# EAGLE board final - shield (EAGLE 9.4.2)
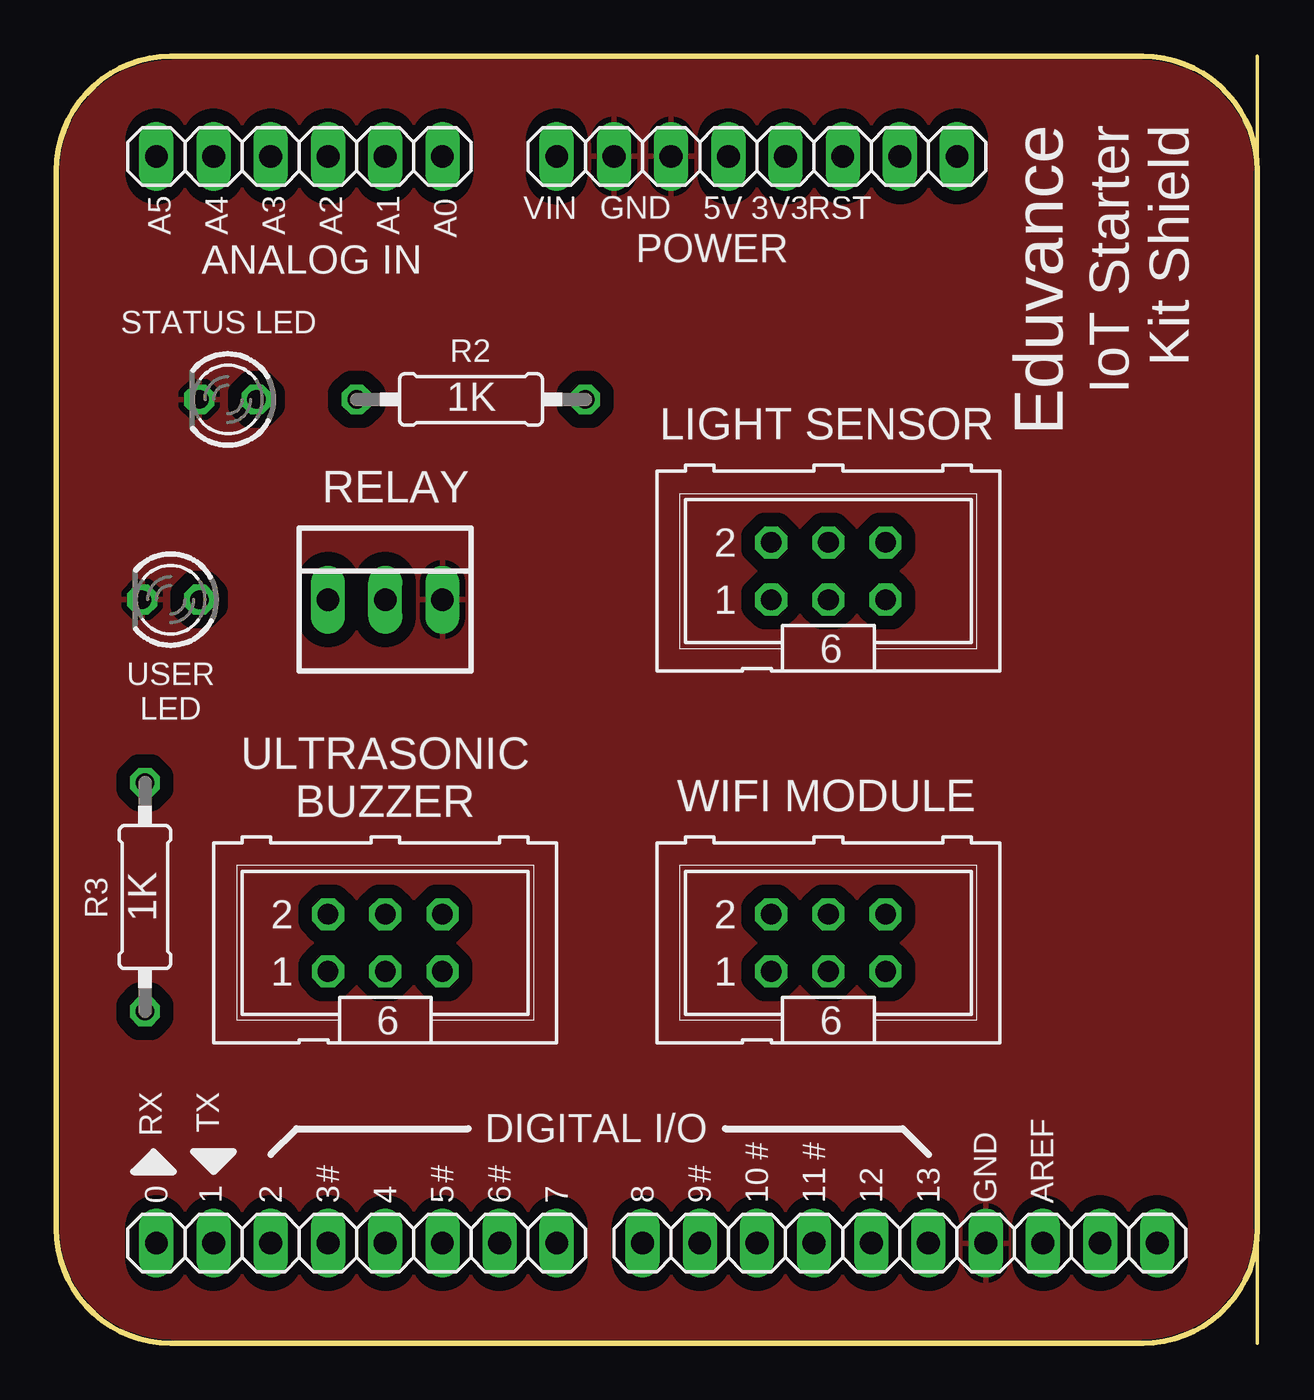
[diagram p0: board, top side]
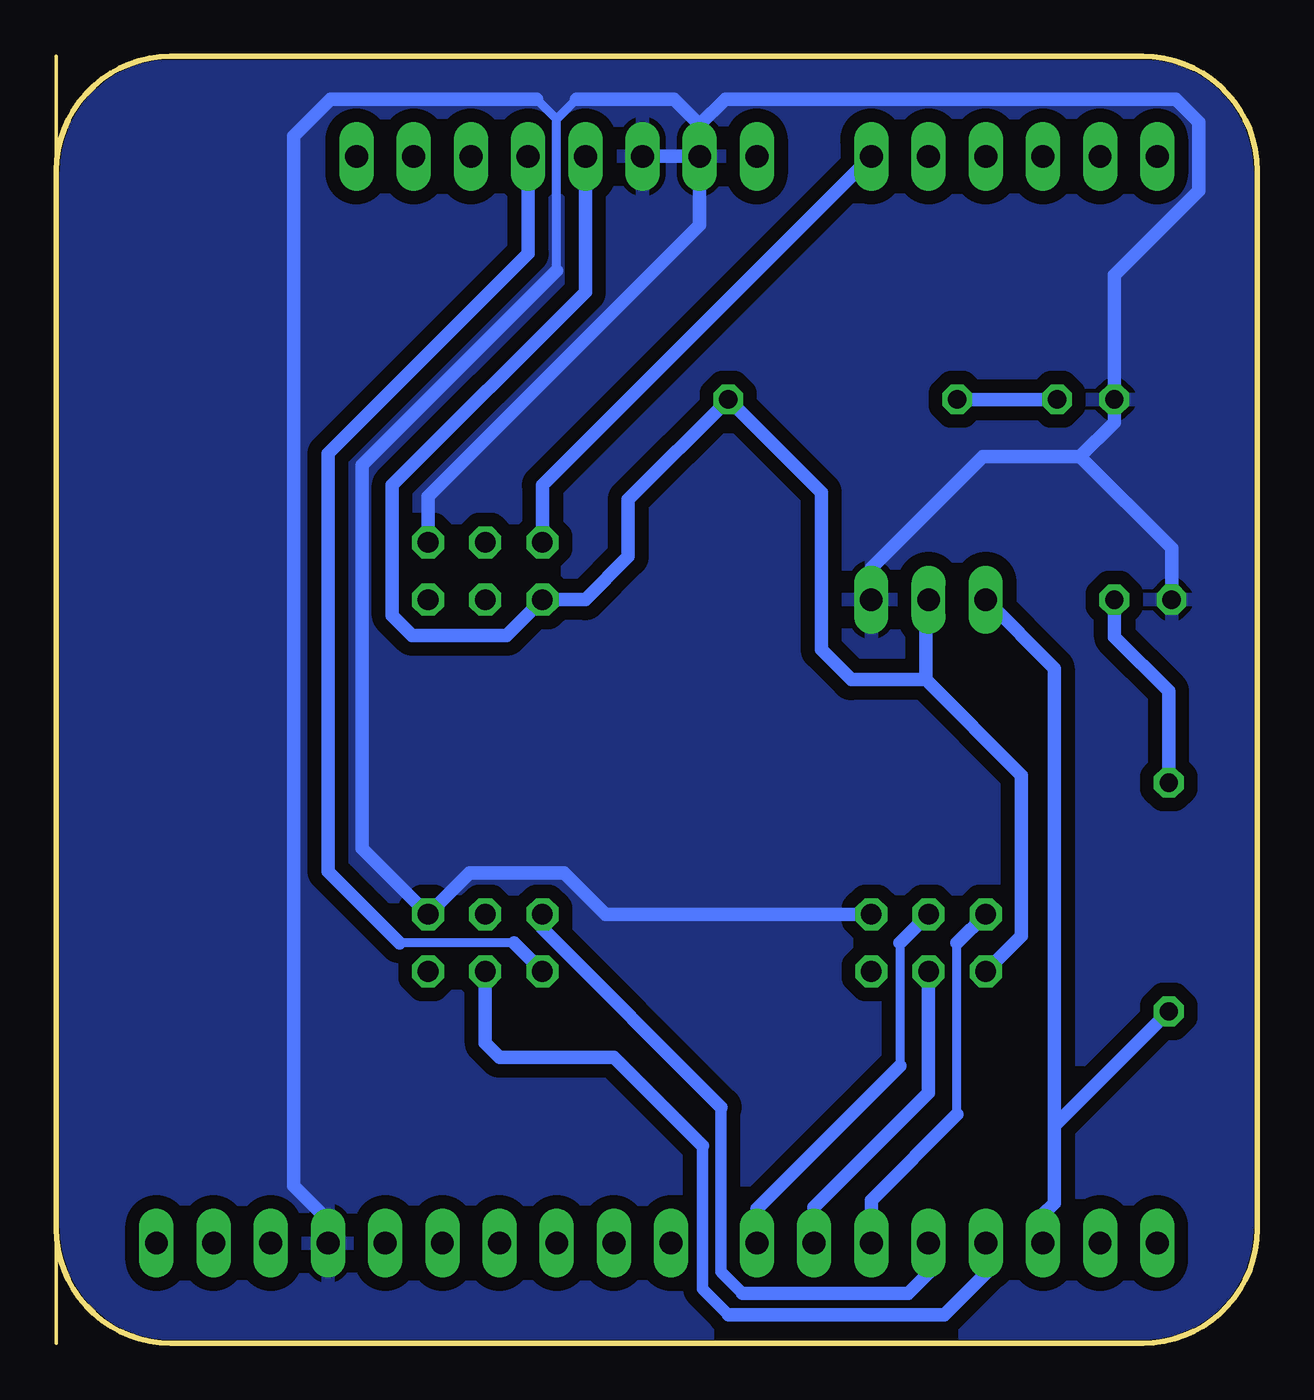
[diagram p1: board, bottom side, seen from below]

Size 53.34 x 57.15 mm. Coordinates in mm from the lower left corner, seen from the top.
Outline: 53.34,0 53.34,57.15
Outline: 5.08,0 48.26,0 arc90 53.34,5.08 53.34,52.07 arc90 48.26,57.15 5.08,57.15 arc90 0,52.07 0,5.08 arc90 5.08,0
Copper layers (1*16): Top 0.035mm / dielectric 1.5mm / Bottom 0.035mm
Design rules "default *": minimum track width 20mil, minimum drill 0.35mm, track to track 24mil, track to pad 24mil, pad to pad 24mil, via to via 24mil, smd to smd 24mil, copper to edge 1mil, drill to drill 6mil, minimum pad ring 10mil, minimum via ring 8mil, stop-mask expansion 4mil, vias tented up to drill 0mil, thermal gap 10mil

## Footprints (pad centres in the part's own frame; a part is rotated, then mirrored left to right if it is on the bottom)
1X02 = drill 1.016 long: 1 -1.27,0; 2 1.27,0
1X06 = drill 1.016 long: 1 -6.35,0; 2 -3.81,0; 3 -1.27,0; 4 1.27,0; 5 3.81,0; 6 6.35,0
1X08 = drill 1.016 long: 1 -8.89,0; 2 -6.35,0; 3 -3.81,0; 4 -1.27,0; 5 1.27,0; 6 3.81,0; 7 6.35,0; 8 8.89,0
LED3MM = drill 0.813 octagon: A -1.27,0; K 1.27,0
ML6 = drill 0.914 octagon: 1 -2.54,-1.27; 2 -2.54,1.27; 3 0,-1.27; 4 0,1.27; 5 2.54,-1.27; 6 2.54,1.27
0207/10 = drill 0.813 octagon: 1 -5.08,0; 2 5.08,0
22-23-2031 = drill 1 long: 1 -2.54,0; 2 0,0; 3 2.54,0

## Placement (x,y rotation side)
_  [1X02]  47.63,4.45 0 top
__  [1X02]  38.74,52.7 0 top
AD  [1X06]  10.8,52.7 180 top
IOH  [1X08]  34.93,4.45 0 top
IOL  [1X08]  13.34,4.45 0 top
LED  USER LED  [LED3MM]  5.08,33.02 180 top
LIGHT_SENSOR2  LIGHT SENSOR  [ML6]  34.29,34.29 0 top
POWER  [1X06]  28.58,52.7 180 top
R2  1K  [0207/10]  18.41,41.91 180 top
R3  1K  [0207/10]  3.94,19.81 270 top
RELAY  22-23-2031  [22-23-2031]  14.61,33.02 0 top
STATUS_LED  STATUS LED  [LED3MM]  7.62,41.91 180 top
ULTRASONIC_BUZZER2  ULTRASONIC BUZZER  [ML6]  14.61,17.78 0 top
WIFI_MODULE2  WIFI MODULE  [ML6]  34.29,17.78 0 top

## Library data of the parts
_ __ AD IOH IOL POWER = pinhead
LED STATUS_LED = led
LIGHT_SENSOR2 ULTRASONIC_BUZZER2 WIFI_MODULE2 = con-harting-ml; OC_FARNELL: unknown; OC_NEWARK: unknown
R2 R3 = rcl; SPICEPREFIX: R
RELAY = con-molex; MF: MOLEX; MPN: 22-23-2031; OC_FARNELL: 1462950; OC_NEWARK: 30C0862

## Nets
GND2: IOH.7 LED.K POWER.4 POWER.5 RELAY.3 STATUS_LED.K
N$1: POWER.3 RELAY.2
N$3: AD.1
N$4: IOL.6
N$5: IOL.7
N$6: IOL.8
N$7: POWER.2
N$8: IOL.4
N$9: IOL.5
N$10: STATUS_LED.A
N$11: IOL.3 R3.2 RELAY.1
S$1: LED.A R3.1

## Tracks (layer width: path | path; a pad name or v marks a point on that pad's centre or on a via)
GND2
  Bottom 0.406: 31.12,54.36 32,55.24 | 31.12,47.62 31.12,54.36 | 30.23,55.24 31.12,54.36
  Bottom 0.61: 17.15,19.05 28.96,19.05 30.8,20.89 34.99,20.89 36.83,19.05 39.75,21.97 39.75,38.99 31.12,47.62 | 36.83,35.56 36.83,37.59 24.77,49.66 POWER.5 | POWER.5 24.77,53.02 | 32,55.24 41.15,55.24 42.8,53.59 42.8,6.99 41.27,5.46 IOH.7 | POWER.5 POWER.4 | 24.77,54.1 23.62,55.24 3.62,55.24 2.6,54.23 2.6,51.18 6.35,47.43 STATUS_LED.K 6.35,40.89 7.87,39.37 | POWER.5 24.77,54.1 | 24.77,54.1 25.91,55.24 30.23,55.24 | RELAY.3 17.15,34.42 12.19,39.37 7.87,39.37 | LED.K 3.81,35.31 7.87,39.37
  pour Bottom: 0,57.15 53.34,57.15 53.34,0 0,0
  pour Top: 0,57.15 0,0 53.34,0 53.34,57.15
N$1
  Bottom 0.61: POWER.3 29.85,46.67 38.42,38.1 38.42,32.32 37.53,31.43 33.34,31.43 31.75,33.02 29.85,33.02 27.94,34.92 27.94,37.47 23.49,41.91 19.37,37.78 19.37,30.8 18.03,29.46 14.73,29.46 | 12.07,16.51 10.48,18.1 10.48,25.21 14.73,29.46 | 14.73,29.46 14.73,32.89 RELAY.2
N$3
  Bottom 0.61: 31.75,35.56 31.75,38.1 AD.1
N$4
  Bottom 0.406: 13.34,10.16 13.34,17.78
  Bottom 0.61: IOL.6 17.15,6.35 13.34,10.16 | 13.34,17.78 12.07,19.05
N$5
  Bottom 0.61: 14.61,16.51 14.61,11.11 19.69,6.03 IOL.7
N$6
  Bottom 0.406: 15.88,17.78 15.88,12.32
  Bottom 0.61: 14.61,19.05 15.88,17.78 | 15.88,12.32 22.23,5.97 IOL.8
N$7
  Bottom 0.406: 33.02,17.78 38.1,17.78
  Bottom 0.61: 31.75,16.51 33.02,17.78 | 38.1,17.78 41.27,20.95 41.27,39.5 32.38,48.39 POWER.2
N$8
  Bottom 0.508: 23.49,1.27 24.64,2.41 24.64,8.76
  Bottom 0.61: 34.29,16.51 34.29,13.34 33.66,12.7 28.58,12.7 24.64,8.76 | 23.49,1.27 13.91,1.27 12.07,3.11 IOL.4
N$9
  Bottom 0.508: 23.81,10.48 23.81,3.17 22.86,2.22
  Bottom 0.61: 31.75,19.05 31.75,18.41 23.81,10.48 | 22.86,2.22 15.49,2.22 14.61,3.11 IOL.5
N$10
  Bottom 0.61: 13.34,41.91 STATUS_LED.A
N$11
  Bottom 0.61: RELAY.1 9.02,29.97 9.02,9.65 | IOL.3 9.53,5.71 9.02,6.22 9.02,9.65 | R3.2 9.02,9.65
S$1
  Bottom 0.61: R3.1 3.94,28.96 6.35,31.37 LED.A

## Text on the board
tPlace: LIGHT SENSOR | RELAY | WIFI MODULE | ULTRASONIC / BUZZER | 0 | 1 | 2 | 3 | 4 | 5 | 6 | 7 | 8 | 9 | 10 | 11 | 12 | 13
tNames: Eduvance | IoT Starter / Kit Shield | A5 | A4 | A3 | A2 | A1 | A0 | VIN | GND | 5V | 3V3 | RST | ANALOG IN | USER / LED | RX | TX | DIGITAL I/O | # | # | # | # | # | # | GND | AREF